# EAGLE board Automated-Temperature-Control-System-with-Visual-and-Auditory-Feedback (EAGLE 9.7.0)

Size 225.69 x 130.85 mm. Coordinates in mm from the lower left corner, seen from the top.
Outline: 0,0 225.69,0 225.69,130.85 0,130.85 0,0
Copper layers (1*16): Top 0.035mm / dielectric 1.5mm / Bottom 0.035mm
Design rules "default": minimum track width 6mil, minimum drill 0.35mm, track to track 6mil, track to pad 6mil, pad to pad 6mil, via to via 6mil, smd to smd 6mil, copper to edge 40mil, drill to drill 6mil, minimum pad ring 10mil, minimum via ring 8mil, stop-mask expansion 4mil, vias tented up to drill 0mil, thermal gap 10mil

## Footprints (pad centres in the part's own frame; a part is rotated, then mirrored left to right if it is on the bottom)
LED-RGB-5MM = drill 0.9: B 0.635,0.635; C -0.635,-0.635; G 1.905,-0.635; R -1.905,0.635
MOTOR = drill 1.118 pad 3.15 octagon: + 2.54,0; - -2.54,0
PIEZO = drill 1 pad 1.6: 1 -3.5,0; 2 3.5,0
RESAD1016W63L850D250B = drill 0.83 pad 1.43: 1 -5.08,0; 2 5.08,0
SWITCH-MOMENTARY-PTH-6.5MM = drill 1.016 pad 1.88: 1 -3.251,2.261; 2 3.251,2.261; 3 -3.251,-2.261; 4 3.251,-2.261
TO92 = drill 0.813 octagon: 1 -1.27,0; 2 0,1.905; 3 1.27,0
LCD-I2C = drill 1.016 long: 1 -19.05,-5.08; 2 -19.05,-7.62; 3 -19.05,-10.16; 4 -19.05,-12.7
ARDUINO-UNO-R3-SHIELD = drill 1.016 pad 1.88: 3.3V 24.13,-2.54; 5V 24.13,0; A0 24.13,12.7; A1 24.13,15.24; A2 24.13,17.78; A3 24.13,20.32; A4 24.13,22.86; A5 24.13,25.4; AREF -24.13,-13.97; D2 -24.13,20.32; D3 -24.13,17.78; D4 -24.13,15.24; D5 -24.13,12.7; D6 -24.13,10.16; D7 -24.13,7.62; D8 -24.13,3.81; D9 -24.13,1.27; D10 -24.13,-1.27; D11 -24.13,-3.81; D12 -24.13,-6.35; D13 -24.13,-8.89; GND@0 24.13,2.54; GND@1 24.13,5.08; GND@2 -24.13,-11.43; IOREF 24.13,-7.62; NC 24.13,-10.16; RES 24.13,-5.08; RX -24.13,25.4; SCL -24.13,-19.05; SDA -24.13,-16.51; TX -24.13,22.86; VIN 24.13,7.62

## Placement (x,y rotation side)
DLED  LED-RGBRCBG-PTH  [LED-RGB-5MM]  195.67,65.15 0 top
M1  MOTOR_HDR  [MOTOR]  133.38,106.05 0 top
PIEZO1  PIEZO  [PIEZO]  192.02,92.46 0 top
R1  150  [RESAD1016W63L850D250B]  192.03,30.13 90 top
R2  10k  [RESAD1016W63L850D250B]  214.89,50.45 90 top
R4  150  [RESAD1016W63L850D250B]  197.11,30.13 90 top
R5  150  [RESAD1016W63L850D250B]  199.65,30.13 90 top
S1  SWITCH_MOMENTARY  [SWITCH-MOMENTARY-PTH-6.5MM]  217.43,31.4 90 top
T2  NPN  [TO92]  169.37,106.38 0 top
U2  TMP36GT9Z_TO92  [TO92]  102.1,106 0 top
U5  LCD-16X2-I2CSUNFOUNDER-IIC  [LCD-I2C]  30.73,123.3 0 top
UMAIN  ARDUINO-UNO-R3-SHIELD  [ARDUINO-UNO-R3-SHIELD]  65.49,29.84 270 top

## Library data of the parts
DLED M1 PIEZO1 R1 R2 R4 R5 S1 U2 U5 UMAIN = Tinkercad
T2 = Tinkercad; CATEGORY: Transistor; SUB-CATEGORY: BJT; TYPE: NPN

## Nets
DLED_B: DLED.B R4.2
DLED_G: DLED.G R5.2
DLED_R: DLED.R R1.2
M1_+: M1.+ T2.1
UMAIN_5V: S1.3 S1.4 T2.3 U2.3 U5.2 UMAIN.5V
UMAIN_A0: U2.2 UMAIN.A0
UMAIN_D2: R2.1 S1.1 S1.2 UMAIN.D2
UMAIN_D3: T2.2 UMAIN.D3
UMAIN_D4: PIEZO1.1 UMAIN.D4
UMAIN_D9: R1.1 UMAIN.D9
UMAIN_D10: R4.1 UMAIN.D10
UMAIN_D11: R5.1 UMAIN.D11
UMAIN_GND: DLED.C M1.- PIEZO1.2 R2.2 U2.1 U5.1 UMAIN.GND@0 UMAIN.GND@1 UMAIN.GND@2
UMAIN_SCL: U5.4 UMAIN.SCL
UMAIN_SDA: U5.3 UMAIN.SDA

## Tracks (layer width: path | path; a pad name or v marks a point on that pad's centre or on a via)
DLED_B  (1 unrouted)
DLED_G  (1 unrouted)
DLED_R  (1 unrouted)
M1_+  (1 unrouted)
UMAIN_5V  (5 unrouted)
UMAIN_A0  (1 unrouted)
UMAIN_D2  (3 unrouted)
UMAIN_D3  (1 unrouted)
UMAIN_D4  (1 unrouted)
UMAIN_D9  (1 unrouted)
UMAIN_D10  (1 unrouted)
UMAIN_D11  (1 unrouted)
UMAIN_GND  (8 unrouted)
UMAIN_SCL  (1 unrouted)
UMAIN_SDA  (1 unrouted)